# Altium PCB PCB1.PcbDoc
Units mil, origin at the board's own origin, x right, y up, seen from the top; angles counter-clockwise.
Board outline 3795 x 1250 mil, 2 copper layers (Top Layer, Bottom Layer); 12 components, 6 nets, 29 pads, 11 vias.
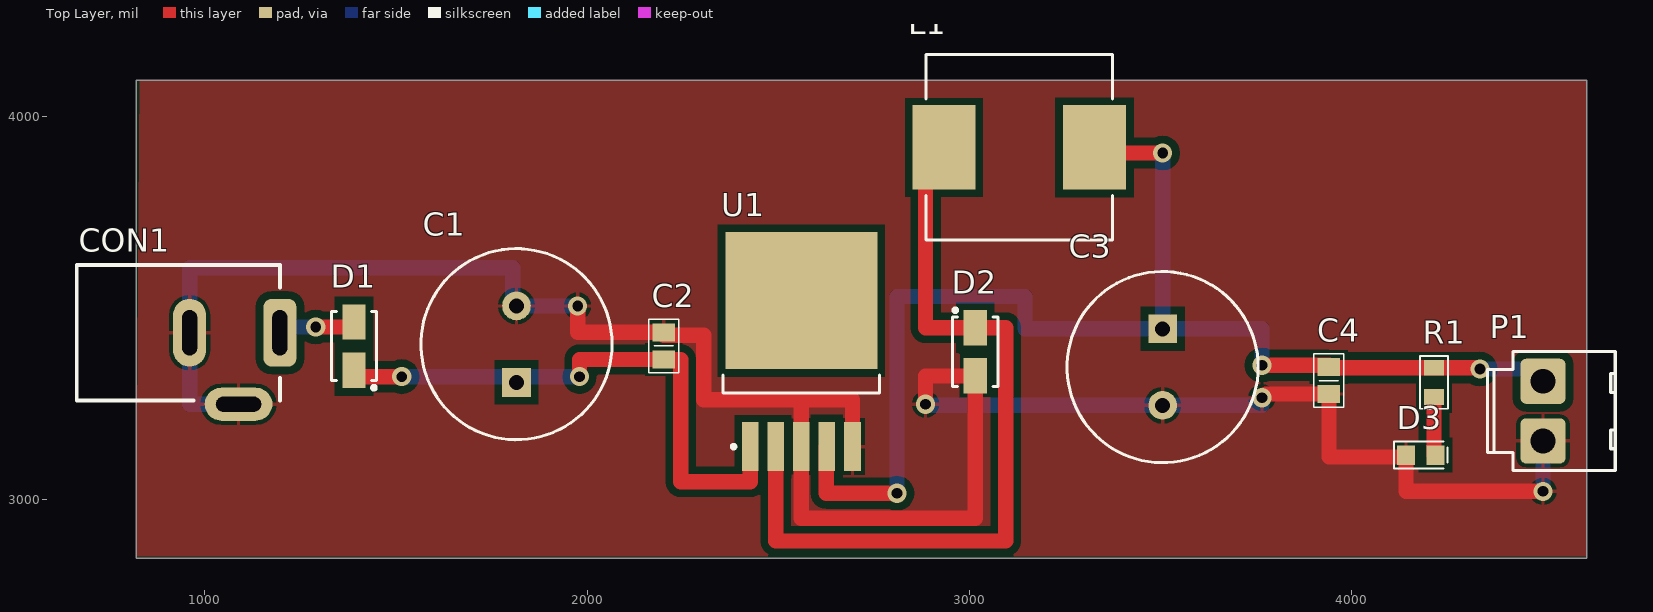
[diagram p0: Top Layer view]
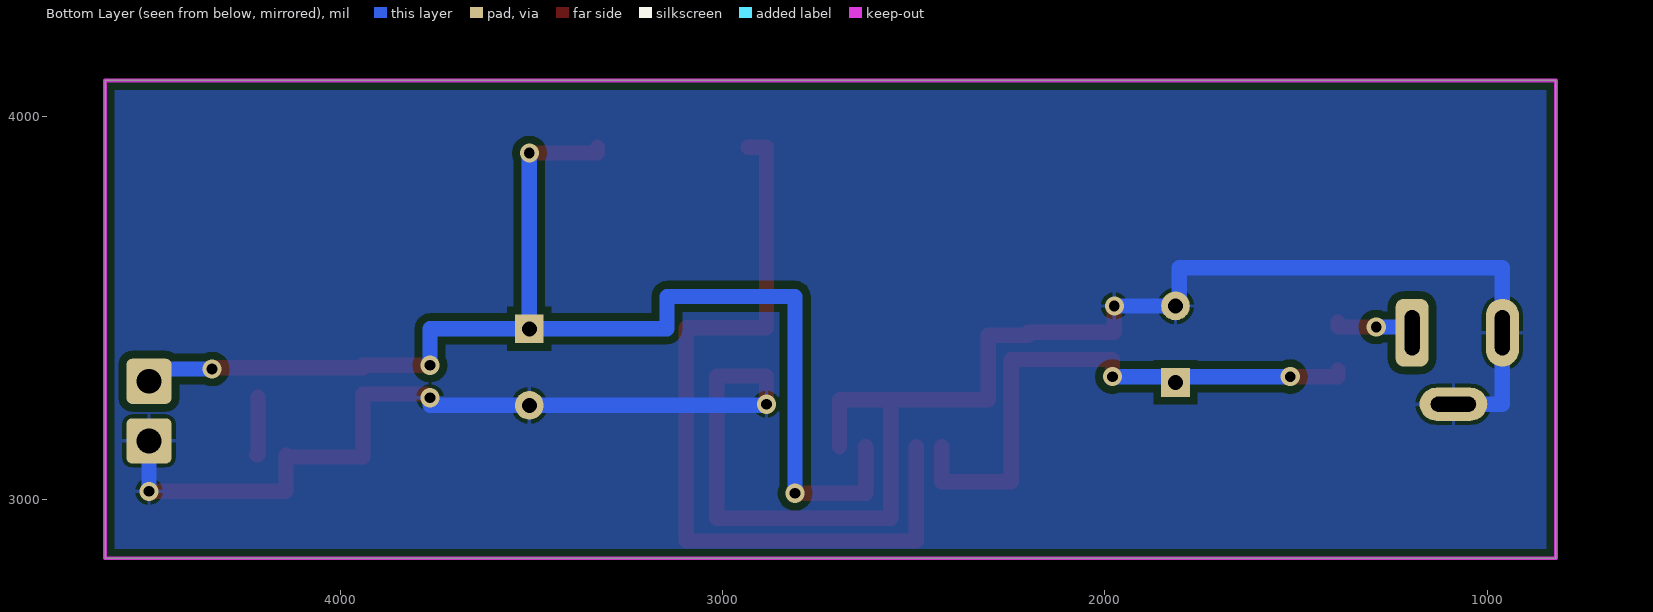
[diagram p1: Bottom Layer view, seen from below]
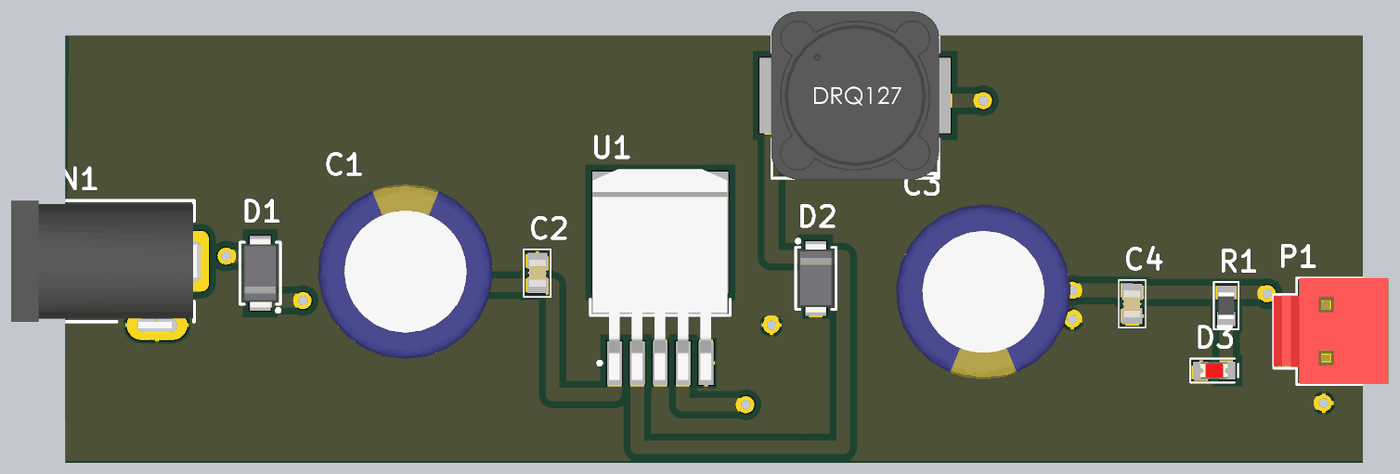
[diagram p2: 3D render of the assembled board from above, using the file's embedded part models]

## Layer stack, top to bottom
Top Solder: solder mask 0.4, Solder Resist, Dk 3.5
Top Layer: signal copper 1.4
Dielectric 1: dielectric 12.6, FR-4, Dk 4.8
Bottom Layer: signal copper 1.4
Bottom Solder: solder mask 0.4, Solder Resist, Dk 3.5

## Board outline
820,2845 820,4095 4170,4095 4615,4095 4615,2845

## Design rules (kind name [scope] priority, off if disabled: settings)
Clearance [All] p1: gap=20 ignorepadtopadclearanceinfootprint=FALSE
PolygonConnect [All] p1: connectstyle=Relief reliefconductorwidth=10 reliefentries=4 polygonreliefangle="90 Angle" airgapwidth=10
RoutingVias [All] p1: holewidth=28 width=50 viastyle="Through Hole" minholewidth=28 minwidth=50 maxholewidth=28 maxwidth=50
SolderMaskExpansion [All] p1: expansion=4
Width [All] p1: maxlimit=100 minlimit=20 preferedwidth=40
30 further rules are at their usual default settings.

## Components (designator, comment, footprint, x,y, rotation, side; value= is the part's Value field where it differs from the comment)
C1 "680uF" CYL/D.500/LS.200 1815,3405 r90 top
C2 "0.1uF" "C 0805" 2200,3400.43 r90 top
C3 "220uF" CYL/D.500/LS.200 3505,3345 r270 top
C4 "0.1uF" "C 0805" 3940,3310 r270 top
CON1 "CON DC PWR" CONN/DC/PWR/5.0MM 1196.22,3435 r0 top
D1 "SS34" "DO-214AC (SMA)" 1390,3400 r270 top
D2 "1N5824" "DO-214AC (SMA)" 3015,3385 r90 top
D3 "Led" "Led 0805 RED" 4180,3115 r180 top
L1 "33uH" "Inductor SMD 12x12x8" 3130,3920 r0 top
P1 "Header 2" HDR/Header/2/VH 4500,3230 r270 top
R1 "1k" "R 0805" 4215,3305 r90 top
U1 "LM2596S-5.0" TO-263-5 2560,3385 r90 top

## Footprints (in the part's own frame and the unit in brackets; to place one, negate y for a bottom-side part, rotate by r counter-clockwise, add the part's x,y. Pads: shape width x height; smd on the part's side, far side on the other; paste and mask are expansions set on the pad)
"C 0805" [mm] "Chip Capacitor, 2-Leads, Body 2.0x1.3mm, IPC Medium Density"
  rect 1.2x1.5 smd: 1(-0.9,0) 2(0.9,0)
  silkscreen extent -1.78,-1 1.78,1, body extent -1,-0.64 1,0.61, height 0.6
CONN/DC/PWR/5.0MM [mm]
  rrect50% 2.2x4.5 hole 1 slot 3 at 90 deg: 1(0,0)
  oval 2.2x4.5 hole 1 slot 3 at 90 deg: 2(-6,0)
  oval 4.5x2.2 hole 1 slot 3 at 0 deg: 3(-2.75,-4.75)
  silkscreen extent -13.5,-4.5 0,4.5, body extent -13.58,-5 0.25,4.5, height 11.02
CYL/D.500/LS.200 [mil]
  rect 75x75 hole 39: 1(-100,0)
  round 75 hole 39: 2(100,0)
  silkscreen extent -250,-250 250,250, body extent -256,-255 254,255, height 866
"DO-214AC (SMA)" [mm] "Molded Diode, 2-Leads, Body 4.3x2.7mm, IPC Medium Density"
  rect 2.35x1.55 smd: 1(-1.6,0) 2(1.6,0)
  silkscreen extent -2.3,-1.5 2.89,1.5, body extent -2.6,-1.3 2.6,1.3, height 2.4
HDR/Header/2/VH [mm]
  rrect25% 3x3 hole 1.65: 1(-1.98,0) 2(1.98,0)
  silkscreen extent -3.96,-3.7 3.96,4.8, body extent -3.93,-3.7 3.93,4.8, height 10.6
"Inductor SMD 12x12x8" [mm] "Precision Wire Wound Inductor, 2-Leads, Body 12.3x12.3mm, IPC Low Density"
  rect 4.2x5.6 smd: 1(-5,0) 2(5,0)
  silkscreen extent -6.2,-6.15 6.2,6.15, body extent -6.25,-6.25 6.25,6.25, height 8.01
"Led 0805 RED" [mm] "Led SMD 0805"
  rect 1.2x1.3 smd: 1(-0.975,0) 2(0.975,0)
  silkscreen extent -1.78,-0.89 1.78,0.89, body extent -1.01,-0.63 1.01,0.62, height 1.1
"R 0805" [mm] "Chip Resistor, 2-Leads, Body 2.0x1.3mm, IPC Medium Density"
  rect 1.05x1.35 smd: 1(-0.975,0) 2(0.975,0)
  silkscreen extent -1.75,-0.92 1.75,0.92, body extent -1,-0.61 1,0.59, height 0.5
TO-263-5 [mm] "D2-PAK, 6-Pads, Body 8.9x10.4mm (max), IPC Medium Density"
  rect 3.25x1.1 smd: 1(-6.3,3.4) 2(-6.3,1.7) 3(-6.3,0) 4(-6.3,-1.7) 5(-6.3,-3.4)
  rect 9.1x10.1 smd: 6(3.4,0)
  silkscreen extent -6.42,-5.2 -1.55,5.2, body extent -7.56,-4.98 8.11,5.02, height 4.83

## Part data
C1 C3: library part Capacitor, "Capacitor pol"
C2 C4: library part "Capacitor NP", "Capacitor non-pol"
CON1: "DC input connector"
D1: library part Diode, "Default Diode"
D2: library part "Diode Schottky", "Schottky Diode"
D3: "Typical LED"
L1: library part Inductor, "Inductor"
P1: "Header, 2-Pin"
R1: library part Resistor, "Resistor"
U1: "Simple Switcher 3A Step-Down Voltage Regulator"

## Via types
v1: diameter 50, hole 28, Top Layer to Bottom Layer, 11 vias

## Nets (pads, with @x,y where several pads share a name; then routed paths per layer and width w, separated by ;. In a path a pad name is that pad's centre, name@x,y a point inside that pad or via, vN(x,y) a via of type N, cw(c..) or ccw(c..) an arc to the next point about the centre after c; other vN are vias at no path point)
5V: C3.1 C4.1 L1.2 P1.1 R1.2 U1.4 | length 3394.1
  Top Layer w40: U1.4 2625,3136.97 2625,3015 v1(2810,3015) ; L1.2 3326.85,3905 v1(3505,3905) ; v1(3765,3350) 3940,3350 C4.1 3940,3343.39 R1.2 4335,3343.39 v1(4335,3340)
  Bottom Layer w40: v1(2810,3015) 2810,3530 3145,3530 3145,3445 C3.1 ; v1(3505,3905) C3.1 ; v1@3765,3345 v1(3765,3350) 3765,3445 C3.1 ; v1(4335,3340) 4500,3340 P1.1
GND: C1.2 C2.2 C3.2 C4.2 CON1.2 CON1.3 D2.1 D3.2 P1.2 U1.3 U1.5 | length 6051.9
  Top Layer w40: v1(1975,3505) 1975,3435.87 C2.2 2200,3428.62 2305,3428.62 2305,3260 2560,3260 ; U1.5 2693.86,3260 2560,3260 ; v1(2885,3247.99) 2885,3322.01 D2.1 3015,2950 2560,2950 U1.3 2560,3260 ; v1(3765,3265) 3774.57,3274.57 C4.2 ; C4.2@3940,3265 3940,3110 D3.2@4141.61,3110 ; D3.2 D3.2@4141.61,3110 ; v1(4500,3020) 4141.61,3020 D3.2@4141.61,3110
  Bottom Layer w40: CON1.3 960,3247.99 CON1.2 960,3605 1805,3605 1805,3505 C1.2 v1(1975,3505) ; v1(2885,3247.99) 2885,3245 C3.2 3765,3245 v1(3765,3265) ; v1(4500,3020) P1.2
NetC1_1: C1.1 C2.1 D1.2 U1.1 | length 1525.1
  Top Layer w40: D1.2 1390,3320 v1(1515,3320) ; v1(1980,3320) 1980,3365 C2.1 2245,3365 2245,3045 2426.14,3045 U1.1
  Bottom Layer w40: v1(1515,3320) C1.1@1815,3320 ; C1.1 C1.1@1815,3320 ; v1(1980,3320) C1.1@1815,3320
NetCON1_1: CON1.1 D1.1 | length 221.8
  Top Layer w40: v1(1290,3450) 1390,3450 D1.1
  Bottom Layer w40: CON1.1 1196.22,3450 v1(1290,3450)
NetD2_2: D2.2 L1.1 U1.2 | length 2137
  Top Layer w40: U1.2 2493.07,2890 3095,2890 3095,3447.99 D2.2 2885,3447.99 2885,3920 L1.1
NetD3_1: D3.1 R1.1 | length 155
  Top Layer w40: R1.1 4215,3115 D3.1
pads on no net: U1.6

## Polygon pours and split planes (outlines as drawn)
GND on Top Layer (solid, remove dead copper, pour order 2): 830,4095 4615,4095 4615,2850 820,2850 820,2855
GND on Bottom Layer (solid, remove dead copper, pour order 0): 820,4095 4615,4095 4615,2845 820,2845

## Keep-outs
Bottom Layer:
  the board outline again, w10